# EAGLE board GDEnvSensorNode_1_5 (EAGLE 9.0.1)
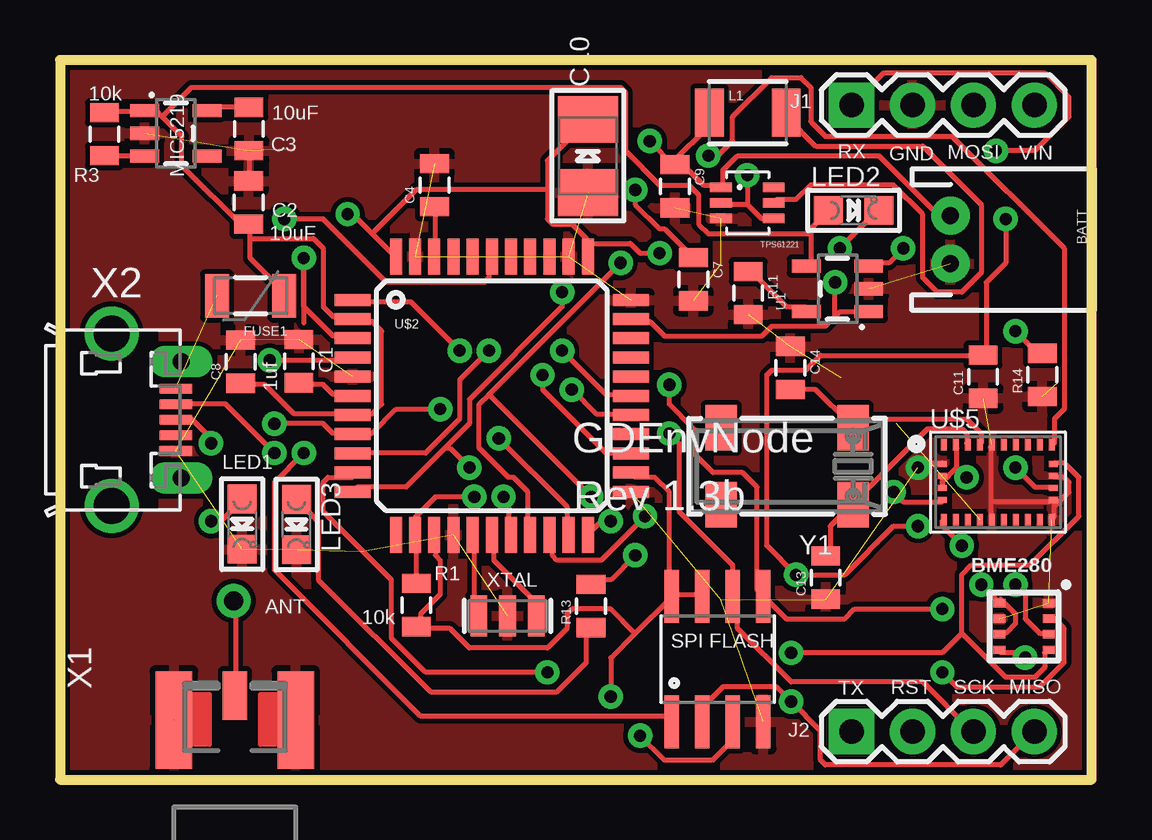
[diagram p0: board, top side]
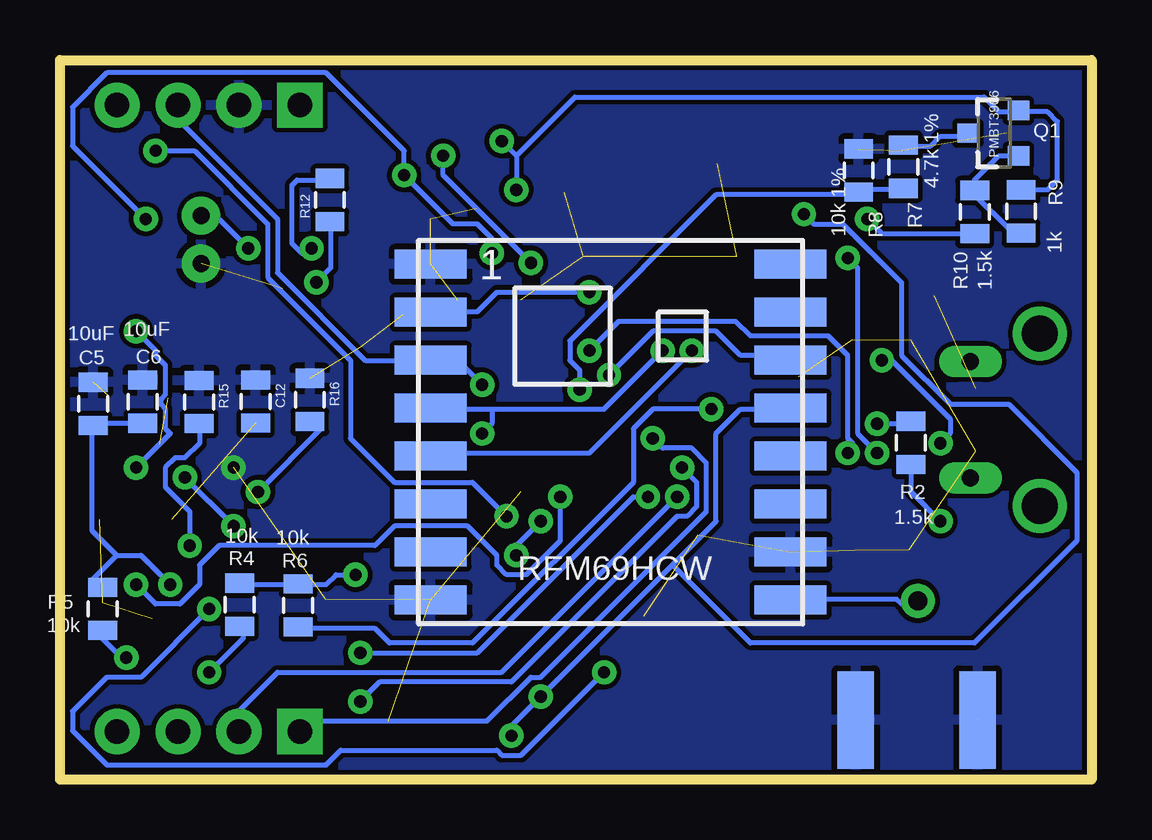
[diagram p1: board, bottom side, seen from below]

Size 43 x 30 mm. Coordinates in mm from the lower left corner, seen from the top.
Outline: 0,0 43,0 43,30 0,30 0,0
Copper layers (1*16): Top 0.035mm / dielectric 1.5mm / Bottom 0.035mm
Design rules "SparkFun": minimum track width 8mil, minimum drill 20mil, track to track 8mil, track to pad 8mil, pad to pad 8mil, via to via 8mil, smd to smd 8mil, copper to edge 8mil, drill to drill 8mil, minimum pad ring 12mil, minimum via ring 10mil, stop-mask expansion 4mil, vias tented up to drill 20mil, thermal gap 10mil

## Footprints (pad centres in the part's own frame; a part is rotated, then mirrored left to right if it is on the bottom)
JST-2-PTH = drill 0.7 pad 1.6: 1 -1,0; 2 1,0
0805 = smd 0.8 x 1.2: 1 -0.9,0; 2 0.9,0
EIA3528-21/B-R = smd 1.95 x 2.5: + 1.525,0; - -1.525,0
PTC-1206 = smd 1 x 1.8: 1 -1.4,0; 2 1.4,0
1X04 = drill 1.016 pad 1.88 square: 1 0,0 | drill 1.016 pad 1.88: 2 2.54,0; 3 5.08,0; 4 7.62,0
1210 = smd 1.2 x 2: 1 -1.6,0; 2 1.6,0
CHIPLED_0805 = smd 1.2 x 1.2: A 0,-1.05; C 0,1.05
SOT23-3 = smd 0.8 x 0.9: 1 -0.95,-1; 2 0.95,-1; 3 0,1.1
SOT23-5 = smd 0.55 x 1.2: 1 -0.95,-1.3; 2 0,-1.3; 3 0.95,-1.3; 4 0.95,1.3; 5 -0.95,1.3
RFM69HCW-XXXS2 = smd 3 x 1.2: 1 -7.5,7; 2 -7.5,5; 3 -7.5,3; 4 -7.5,1; 5 -7.5,-1; 6 -7.5,-3; 7 -7.5,-5; 8 -7.5,-7; 9 7.5,-7; 10 7.5,-5; 11 7.5,-3; 12 7.5,-1; 13 7.5,1; 14 7.5,3; 15 7.5,5; 16 7.5,7
BME280_LGA = smd 0.5 x 0.35: P$1 1.025,0.975; P$2 1.025,0.325; P$3 1.025,-0.325; P$4 1.025,-0.975; P$5 -1.025,-0.975; P$6 -1.025,-0.325; P$7 -1.025,0.325; P$8 -1.025,0.975
SO08 = smd 0.61 x 2.21: 1_CS -1.905,-2.616; 2_SO -0.635,-2.616; 3_WP 0.635,-2.616; 4_GND 1.905,-2.616; 5_SI 1.905,2.616; 6_SCK 0.635,2.616; 7_HOLD -0.635,2.616; 8_VCC -1.905,2.616
TQFP44 = smd 1.5 x 0.5: 1 -5.8,4; 2 -5.8,3.2; 3 -5.8,2.4; 4 -5.8,1.6; 5 -5.8,0.8; 6 -5.8,0; 7 -5.8,-0.8; 8 -5.8,-1.6; 9 -5.8,-2.4; 10 -5.8,-3.2; 11 -5.8,-4; 23 5.8,-4; 24 5.8,-3.2; 25 5.8,-2.4; 26 5.8,-1.6; 27 5.8,-0.8; 28 5.8,0; 29 5.8,0.8; 30 5.8,1.6; 31 5.8,2.4; 32 5.8,3.2; 33 5.8,4 | smd 0.5 x 1.5: 12 -4,-5.8; 13 -3.2,-5.8; 14 -2.4,-5.8; 15 -1.6,-5.8; 16 -0.8,-5.8; 17 0,-5.8; 18 0.8,-5.8; 19 1.6,-5.8; 20 2.4,-5.8; 21 3.2,-5.8; 22 4,-5.8; 34 4,5.8; 35 3.2,5.8; 36 2.4,5.8; 37 1.6,5.8; 38 0.8,5.8; 39 0,5.8; 40 -0.8,5.8; 41 -1.6,5.8; 42 -2.4,5.8; 43 -3.2,5.8; 44 -4,5.8
TPS61221 = smd 0.9 x 0.4: P$1 0,0; P$2 0,-0.65; P$3 0,-1.3; P$4 2.2,-1.3; P$5 2.2,-0.65; P$6 2.2,0
RFM12B-ANTENNA = drill 0.8 pad 1.422: P$1 0,0
MICROBUILDER_BNO055 = smd 0.25 x 0.475: 1 -2.25,1.562; 6 -2.25,-1.562; 7 -1.75,-1.562; 8 -1.25,-1.562; 9 -0.75,-1.562; 10 -0.25,-1.562; 11 0.25,-1.562; 12 0.75,-1.562; 13 1.25,-1.562; 14 1.75,-1.562; 15 2.25,-1.562; 20 2.25,1.562; 21 1.75,1.562; 22 1.25,1.562; 23 0.75,1.562; 24 0.25,1.562; 25 -0.25,1.562; 26 -0.75,1.562; 27 -1.25,1.562; 28 -1.75,1.562 | smd 0.375 x 0.25: 2 -2.312,0.75; 3 -2.312,0.25; 4 -2.312,-0.25; 5 -2.312,-0.75; 16 2.312,-0.75; 17 2.312,-0.25; 18 2.312,0.25; 19 2.312,0.75
SMA_EDGELAUNCH_UFL = smd 4.064 x 1.524: GND@1 2.032,-2.54; GND@2 2.032,2.54 | smd 4.064 x 1.524 bottom: GND@3 2.032,2.54; GND@4 2.032,-2.54 | smd 2.032 x 1.016: P 3.048,0
ZX62D-B-5PA8 = smd 1.35 x 0.4: 1 4.825,1.3; 2 4.825,0.65; 3 4.825,0; 4 4.825,-0.65; 5 4.825,-1.3 | drill 1.5: S1 2.15,-3.6; S2 2.15,3.6 | drill 0.7 long: S3 5.05,2.425; S4 5.05,-2.425
RESONATOR-SMD = smd 0.7 x 1.7: 1 -1.2,0; 2 0,0; 3 1.2,0
CRYSTAL_8X3.8 = smd 1.3 x 1.9: P$1 -2.75,-1.6; P$2 2.75,-1.6; P$3 2.75,1.6; P$4 -2.75,1.6

## Placement (x,y rotation side)
BATT  [JST-2-PTH]  37.12,22.51 270 top
C1  1uf  [0805]  9.96,17.45 90 top
C2  10uF  [0805]  7.87,24.05 90 top
C3  10uF  [0805]  7.88,27.12 270 top
C4  .1uf  [0805]  15.61,24.78 90 top
C5  10uF  [0805]  41.62,15.66 90 bottom
C6  10uF  [0805]  39.55,15.75 90 bottom
C7  10uF  [0805]  26.4,20.86 270 top
C8  10uF  [0805]  7.53,17.42 90 top
C9  10uF  [0805]  25.64,24.73 270 top
C10  220uF  [EIA3528-21/B-R]  22,26 90 top
C11  .1uF  [0805]  38.48,16.8 90 top
C12  .1uF  [0805]  34.84,15.76 270 bottom
C13  22pF  [0805]  31.92,8.42 90 top
C14  22pF  [0805]  30.45,17.16 270 top
FRAME1  FRAME-LETTER  [CREATIVE_COMMONS]  35.59,-9.89 0 top  (outside the outline)
FUSE1  500ma  [PTC-1206]  7.95,20.17 180 top
J1  [1X04]  33,28.12 0 top
J2  [1X04]  33,2 0 top
L1  4.7uH  [1210]  28.67,27.81 0 top
LED1  [CHIPLED_0805]  7.6,10.65 180 top
LED2  Yellow  [CHIPLED_0805]  33.08,23.73 270 top
LED3  [CHIPLED_0805]  9.86,10.63 180 top
Q1  PMBT3906  [SOT23-3]  4.05,26.95 90 bottom
R1  10k  [0805]  14.85,7.27 90 top
R2  1.5k  [0805]  7.53,14.04 90 bottom
R3  10k  [0805]  1.85,26.91 90 top
R4  10k  [0805]  35.52,7.29 90 bottom
R5  10k  [0805]  41.23,7.12 90 bottom
R6  10k  [0805]  33.07,7.26 90 bottom
R7  4.7k 1%  [0805]  7.84,25.55 90 bottom
R8  10k 1%  [0805]  9.71,25.39 270 bottom
R9  1k  [0805]  2.94,23.68 270 bottom
R10  1.5k  [0805]  4.87,23.66 270 bottom
R11  10k  [0805]  28.69,20.28 270 top
R12  1K  [0805]  31.75,24.16 90 bottom
R13  1.5k  [0805]  22.13,7.23 90 top
R14  10k  [0805]  40.95,16.87 90 top
R15  10k  [0805]  37.2,15.74 270 bottom
R16  10k  [0805]  32.58,15.83 270 bottom
U1  MCP73831  [SOT23-5]  32.41,20.46 90 top
U2  RFM69HCW  [RFM69HCW-XXXS2]  20.05,14.48 0 bottom
U3  BME280  [BME280_LGA]  40.19,6.38 0 top
U4  MIC5219  [SOT23-5]  4.83,26.94 270 top
U$1  SPI FLASH  [SO08]  27.41,5.01 0 top
U$2  ATMEGA32U4TQFP-44  [TQFP44]  18,16 0 top
U$3  TPS61221  [TPS61221]  27.55,24.69 0 top
U$4  RFM12B_ANTENNA  [RFM12B-ANTENNA]  7.24,7.45 0 top
U$5  [MICROBUILDER_BNO055]  39.1,12.4 0 top
X1  [SMA_EDGELAUNCH_UFL]  7.29,0.45 90 top
X2  ZX62D-B-5PA8  [ZX62D-B-5PA8]  0,15 0 top
XTAL  RESONATORSMD  [RESONATOR-SMD]  18.65,6.83 180 top
Y1  32.768khz  [CRYSTAL_8X3.8]  30.31,13.06 180 top

## Library data of the parts
BATT = SparkFun-Connectors-ME_Desktop; PROD_ID: CONN-09863; SKU: PRT-09914
C1-C9 C11-C14 = SparkFun-Capacitors
C10 LED1-LED3 Y1 = microbuilder
FRAME1 = SparkFun-Aesthetics
FUSE1 = SparkFun-PowerIC; PROD_ID: RES-11150
J1 J2 = SparkFun-Connectors; PROD_ID: CONN-09696
L1 R1-R16 = SparkFun-Passives
Q1 = SparkFun-DiscreteSemi; PROD_ID: TRANS-08052
U1 = SparkFun-PowerIC; PROD_ID: IC-09995
U2 = SparkFun-RF; PROD_ID: IC-11997, IC-12053
U3 = BME280ComponentLibrary; PROD_ID: IC-13090
U4 = SparkFun-PowerIC; PROD_ID: VREG-09872
U$1 = LowPowerLab
U$2 = SparkFun-DigitalIC
U$3 = GDTech; AVAILABILITY: Unavailable; DESCRIPTION: the tps6122x family devices provide a power-supply solution for products powered by either a single-cell two-cell or ...; MF: Texas Instruments; MP: TPS61221; PACKAGE: SC-70 Texas Instruments; PRICE: None
U$4 = LowPowerLab; LABEL: ANT
U$5 = Adafruit BNO055
X1 = adafruit
X2 = GDTech; MF: Hirose; MPN: ZX62D-B-5PA8; OC_FARNELL: 2300438; OC_NEWARK: 69W0712
XTAL = GDTech

## Nets
3.3V: C10.+ C11.2 R1.1 R4.2 R6.2 U2.13 U$1.3_WP U$1.7_HOLD U$1.8_VCC U$2.14 U$2.24 U$2.34 U$2.44 U$3.P$2 U$3.P$4 U$5.3 U$5.4 U$5.28
A3: R10.2 U$2.39
A7: R7.1 R8.2 U$2.27
ANT: U2.9 U$4.P$1 X1.P
CHG_STAT: R12.1 U1.1 U$2.32
D3: U$3.P$6
D4: U2.14 U$2.25
D7: U2.5 U$2.1
D8: U$1.1_CS U$2.28
D+: U$2.4 X2.3
D-: U$2.3 X2.2
GND: BATT.2 C1.2 C2.2 C3.2 C4.2 C5.2 C6.2 C7.2 C8.2 C9.2 C10.- C11.1 C12.1 C13.1 C14.1 J1.2 LED1.C LED3.C R8.1 R11.2 R14.1 R15.1 R16.1 U1.2 U2.1 U2.8 U2.10 U3.P$1 U3.P$7 U4.2 U$1.4_GND U$2.5 U$2.15 U$2.23 U$2.33 U$2.35 U$2.43 U$3.P$3 U$5.2 U$5.10 U$5.15 U$5.16 U$5.18 U$5.25 X1.GND@1 X1.GND@2 X1.GND@3 X1.GND@4 X2.5 XTAL.2
L: L1.2 U$3.P$5
MISO: J2.4 U2.2 U$1.2_SO U$2.11
MOSI: J1.3 U2.3 U$1.5_SI U$2.10
N$1: U$2.16 XTAL.3
N$2: U$2.17 XTAL.1
N$3: LED1.A R2.1
N$4: LED2.C R12.2
N$5: R4.1 U3.P$2
N$6: C3.1 U4.5
N$7: C4.1 U$2.42
N$8: LED3.A R13.1
N$9: C12.2 U$5.9
N$10: R3.1 U4.3
N$11: Q1.1 R9.2 R10.1
N$12: Q1.3 R7.2
N$13: R13.2 U$2.22
N$15: C5.1 C6.1 R5.2 U3.P$6 U3.P$8
N$16: R11.1 U1.5
N$17: R5.1 U3.P$5
N$19: C13.2 U$5.27 Y1.P$4
N$20: C1.1 U$2.6
N$21: C14.2 U$5.26 Y1.P$1
N$25: U$5.14
N$26: U$5.11
N$27: R14.2 U$5.17
N$28: R15.2 U$5.6
N$29: R16.2 U$5.5
RST: J2.2 R1.2 U$2.13
RX: J1.1 U$2.20
SCK: J2.3 U2.4 U$1.6_SCK U$2.9
SCL: U3.P$4 U$2.18 U$5.19
SDA: U3.P$3 U$2.19 U$5.20
SS: R2.2 R6.1 U$2.8
TX: J2.1 U$2.21
VBAT: BATT.1 C7.1 C9.1 L1.1 Q1.2 R9.1 U1.3 U$3.P$1
VBUS: C2.1 C8.1 FUSE1.1 LED2.A R3.2 U1.4 U4.1 U$2.2 U$2.7
VBUS_RAW: FUSE1.2 X2.1
VIN: J1.4

## Tracks (layer width: path | path; a pad name or v marks a point on that pad's centre or on a via)
3.3V  (via drill 0.51)
  Top 0.203: U$2.14 15.65,10.16 15.65,9.35 15.85,9.14 15.85,7.72 15.04,6.91 15.04,6.5 R1.1 15.04,6.3 16.26,6.3 17.07,5.49 20.32,5.49 21.13,6.3 21.13,6.91 21.34,7.11 22.96,7.11 23.98,6.1 | U$2.24 23.98,12.6 24.79,12.6 25.4,11.99 25.4,7.72 U$1.8_VCC | v24.18,1.83 25.2,0.81 27.23,0.81 28.04,1.63 28.04,2.23 U$1.3_WP | v22.96,3.45 22.96,5.08 23.98,6.1 | 23.98,6.1 25.4,7.52 U$1.8_VCC | U$1.7_HOLD 26.62,7.72 25.6,7.72 U$1.8_VCC | 36.78,12.39 36.78,12.6 U$5.3 | 36.78,12.39 36.78,12.19 U$5.4 | 37.39,13.01 37.39,13.82 U$5.28 | 36.78,12.39 37.39,13.01 | v37.8,12.6 37.39,13.01 | v35.76,10.57 34.75,10.57 32.72,8.53 v30.68,8.53 29.46,9.75 29.46,16.87 29.67,17.07 31.09,17.07 31.7,17.68 38.41,17.68 C11.2 38.61,17.88 38.61,20.73 39.42,21.54 v39.42,23.37 | 13.01,22.76 11.99,23.77 v11.99,23.57 | 13.01,22.76 13.82,21.95 U$2.44 | 28.65,23.98 27.64,23.98 U$3.P$2 | 28.65,23.98 29.26,23.37 29.67,23.37 U$3.P$4 | 21.95,22.35 21.95,22.55 21.34,23.16 20.52,23.16 20.32,23.37 20.32,24.59 | 21.95,22.35 21.95,21.95 U$2.34 21.95,22.35 | 20.32,24.59 20.32,25.81 21.95,27.43 C10.+ | v28.65,25.2 28.65,23.98 | v24.99,21.95 24.18,21.95 23.77,22.35 21.95,22.35 | 13.01,22.76 14.83,24.59 20.32,24.59
  Bottom 0.203: v24.18,1.83 24.18,2.23 v22.96,3.45 17.48,8.94 | 17.48,8.94 15.65,10.77 15.65,14.43 14.63,15.44 12.6,15.44 U2.13 | R4.2 35.36,8.13 33.12,8.13 R6.2 32.92,8.13 31.9,8.13 31.5,8.53 v30.68,8.53 | v35.76,10.57 v37.8,12.6 | v24.99,21.95 24.99,22.55 25.6,23.16 26.62,23.16 v28.65,25.2 28.65,26.21 31.9,29.46 41.05,29.46 42.47,28.04 42.47,26.42 v39.42,23.37 | 17.48,8.94 14.22,5.69 4.88,5.69 0.61,9.96 0.61,12.8 3.45,15.65 5.89,15.65 7.92,17.68 7.92,20.73 10.36,23.16 11.58,23.16 v11.99,23.57
A3  (via drill 0.51)
  Top 0.203: v9.35,23.37 10.97,23.37 13.61,20.73 17.68,20.73 17.88,20.93 17.88,21.74 U$2.39
  Bottom 0.203: v9.35,23.37 8.74,22.76 R10.2
A7  (via drill 0.51)
  Top 0.203: v21.34,16.26 22.35,15.24 23.77,15.24 U$2.27
  Bottom 0.203: R7.1 7.92,24.59 9.55,24.59 R8.2 9.75,24.38 15.65,24.38 21.74,18.29 21.74,17.48 21.34,17.07 v21.34,16.26
ANT
  Top 0.203: X1.P 7.32,3.66 7.32,7.32 U$4.P$1
  Bottom 0.203: U2.9 12.39,7.52 8.13,7.52 7.92,7.32 7.32,7.32 U$4.P$1
CHG_STAT  (via drill 0.51)
  Top 0.203: 32.31,19.3 31.9,18.9 29.67,18.9 29.26,18.49 25.2,18.49 24.59,19.1 23.98,19.1 U$2.32 | 32.31,19.3 32.51,19.51 33.53,19.51 U1.1 | 32.31,19.3 v32.31,20.73
  Bottom 0.203: v32.31,20.73 31.7,21.34 31.7,23.16 R12.1
D4  (via drill 0.51)
  Top 0.203: v20.12,16.87 20.12,16.26 22.76,13.61 23.77,13.61 U$2.25
  Bottom 0.203: v20.12,16.87 18.29,18.69 15.65,18.69 14.63,17.68 12.6,17.68 U2.14
D7  (via drill 0.51)
  Top 0.203: v16.66,17.88 14.63,19.91 12.39,19.91 U$2.1
  Bottom 0.203: v16.66,17.88 20.93,13.61 27.43,13.61 U2.5
D8  (via drill 0.51)
  Top 0.203: v20.93,17.88 22.76,16.05 23.77,16.05 U$2.28 | v10.16,13.61 8.94,12.39 8.94,8.74 15.04,2.64 25.2,2.64 25.4,2.44 U$1.1_CS
  Bottom 0.203: v20.93,17.88 19.71,19.1 14.83,19.1 14.22,18.49 10.97,18.49 10.16,17.68 10.16,14.22 9.96,14.02 9.96,13.82 v10.16,13.61
D+  (via drill 0.51)
  Top 0.203: v6.3,14.02 6.3,14.22 5.49,15.04 4.88,15.04 X2.3 | v8.74,17.48 12.19,17.48 U$2.4
  Bottom 0.203: v6.3,14.02 5.89,14.43 5.89,15.04 8.33,17.48 v8.74,17.48
D-  (via drill 0.51)
  Top 0.203: v8.94,13.61 6.91,15.65 4.88,15.65 X2.2 | U$2.3 12.19,18.49 11.38,18.49 10.16,19.71 v10.16,21.74 10.16,19.05
  Bottom 0.203: v8.94,13.61 9.75,14.43 9.75,21.34 v10.16,21.74
GND  (via drill 0.51)  (29 unrouted)
  Top 0.203: 38.81,11.58 38.81,13.82 U$5.25 | 38.81,11.58 38.81,10.97 U$5.10 | 41.45,11.38 41.45,10.97 U$5.15 | 41.45,11.38 41.45,11.58 U$5.16 41.25,11.58 38.81,11.58 | 41.45,11.38 42.06,11.99 42.06,12.39 41.86,12.6 41.45,12.6 U$5.18 | v35.76,13.01 35.97,13.21 36.78,13.21 U$5.2 | C3.2 C2.2
  pour Top: 0,30 43,30 43,0 0,0
  pour Bottom: 0,30 43,30 43,0 0,0
L
  Top 0.203: U$3.P$5 29.87,24.18 30.68,24.18 31.29,24.79 34.75,24.79 35.97,23.57 35.97,20.93 36.58,20.32 37.59,20.32 38.41,21.13 38.41,23.98 35.97,26.42 31.5,26.42 30.28,27.64 L1.2
MISO  (via drill 0.51)
  Top 0.203: U$1.2_SO 26.82,2.44 26.82,3.05 27.64,3.86 29.87,3.86 v30.48,3.25 31.7,2.03 31.7,0.81 31.9,0.61 39.22,0.61 40.44,1.83 J2.4 | 16.05,13.82 17.07,14.83 17.07,15.85 20.93,19.71 v20.93,20.32 | 16.05,13.82 14.43,12.19 12.39,12.19 U$2.11 | v17.07,13.01 16.26,13.82 16.05,13.82
  Bottom 0.203: v20.93,20.32 24.79,20.32 25.6,19.51 27.43,19.51 U2.2 | v30.48,3.25 29.67,4.06 24.18,4.06 17.27,10.97 16.87,10.97 16.46,11.38 16.46,12.39 v17.07,13.01
MOSI  (via drill 0.51)
  Top 0.203: v20.32,4.47 15.24,4.47 13.82,5.89 13.82,8.33 10.97,11.18 10.97,12.39 11.18,12.6 12.19,12.6 U$2.10 | v36.78,7.11 33.12,7.11 32.72,6.71 30.28,6.71 29.46,7.52 U$1.5_SI 29.26,7.72 29.06,7.92 29.06,12.19 28.45,12.8 27.23,12.8 26.42,13.61 26.42,14.63 25.4,15.65 v25.4,16.46
  Bottom 0.203: J1.3 38,28.04 38,27.43 33.93,23.37 33.93,21.13 30.28,17.48 27.64,17.48 U2.3 27.43,17.48 26.42,17.48 v25.4,16.46 | v20.32,4.47 23.77,1.02 24.59,1.02 24.79,1.22 31.29,1.22 31.9,0.61 41.05,0.61 42.47,2.03 42.47,2.85 41.05,4.27 39.62,4.27 v36.78,7.11
N$1
  Top 0.203: U$2.16 17.27,10.16 17.27,6.91 XTAL.3
N$2
  Top 0.203: U$2.17 18.09,10.16 18.09,9.14 19.71,7.52 19.71,6.91 XTAL.1
N$3  (via drill 0.51)
  Top 0.203: v6.3,10.77 6.71,10.77 7.52,11.58 LED1.A
  Bottom 0.203: v6.3,10.77 7.52,11.99 7.52,13.01 R2.1
N$4  (via drill 0.51)
  Top 0.203: v32.51,22.15 33.93,23.57 LED2.C
  Bottom 0.203: v32.51,22.15 32.72,21.95 32.92,21.95 33.33,22.35 33.33,24.79 33.12,24.99 31.9,24.99 R12.2
N$5  (via drill 0.51)
  Top 0.203: v36.78,4.47 37.39,3.86 40.84,3.86 41.86,4.88 41.86,6.3 41.45,6.71 41.25,6.71 U3.P$2
  Bottom 0.203: v36.78,4.47 35.36,5.89 35.36,6.3 R4.1
N$6
  Top 0.203: 7.92,27.84 C3.1 7.72,28.04 6.3,28.04 U4.5
N$7
  Top 0.203: C4.1 15.65,23.77 15.65,21.95 U$2.42
N$8
  Top 0.203: R13.1 21.95,6.3 21.95,4.88 20.73,3.66 15.44,3.66 10.77,8.33 10.77,10.77 9.96,11.58 LED3.A
N$9  (1 unrouted)
N$10
  Top 0.203: U4.3 3.45,26.01 2.03,26.01 R3.1
N$11
  Bottom 0.203: Q1.1 3.25,26.01 3.86,26.01 4.88,24.99 4.88,24.59 R10.1 4.88,24.38 3.45,22.96 3.05,22.96 R9.2
N$12
  Bottom 0.203: Q1.3 5.28,26.82 6.3,26.82 6.71,26.42 7.72,26.42 R7.2
N$13  (via drill 0.51)
  Top 0.203: v23.98,9.35 22.96,8.33 22.15,8.33 R13.2 | v22.96,10.77 22.55,10.77 22.15,10.36 U$2.22
  Bottom 0.203: v23.98,9.35 23.98,9.75 v22.96,10.77
N$15  (via drill 0.51)
  Top 0.203: U3.P$6 39.22,6.1 39.42,6.1 39.83,6.5 39.83,6.91 39.22,7.52 U3.P$8 39.01,7.52 v38.41,8.13
  Bottom 0.203: C6.1 39.62,14.83 41.45,14.83 C5.1 41.66,14.63 41.66,10.36 40.64,9.35 | v38.41,8.13 39.62,9.35 40.64,9.35 | 40.64,9.35 41.66,8.33 41.25,7.92 R5.2
N$16
  Top 0.203: U1.5 31.09,19.71 30.28,19.71 28.85,21.13 R11.1
N$17  (via drill 0.51)
  Top 0.203: v40.23,5.08 40.03,5.28 39.22,5.28 U3.P$5
  Bottom 0.203: v40.23,5.08 40.44,5.08 41.45,6.1 41.25,6.3 R5.1
N$19
  Top 0.203: U$5.27 37.8,14.02 37.8,14.43 37.59,14.63 36.17,14.63 33.12,11.58 Y1.P$4 32.92,11.38 32.11,10.57 32.11,9.35 C13.2
N$20
  Top 0.203: C1.1 10.16,16.46 10.97,16.46 11.38,16.05 12.19,16.05 U$2.6
N$21
  Top 0.203: U$5.26 38.41,14.02 38.41,14.43 37.8,15.04 33.33,15.04 33.12,14.83 Y1.P$1 32.92,14.83 31.5,16.26 30.48,16.26 C14.2
N$27  (via drill 0.51)
  Top 0.203: v39.83,13.01 40.64,12.19 41.25,12.19 U$5.17 | v39.83,18.69 40.84,17.68 R14.2
  Bottom 0.203: v39.83,13.01 38.41,14.43 38.61,14.63 38.61,15.44 38.81,15.65 38.81,15.85 38.61,16.05 38.61,17.27 39.01,17.68 39.01,17.88 v39.83,18.69
N$28  (via drill 0.51)
  Top 0.203: v37.59,9.75 36.78,10.57 36.78,10.77 U$5.6
  Bottom 0.203: v37.59,9.75 37.59,11.18 38.61,12.19 38.61,13.01 38.2,13.41 37.8,13.41 37.19,14.02 37.19,14.83 R15.2
N$29  (via drill 0.51)
  Top 0.203: v34.75,11.99 35.15,11.58 36.78,11.58 U$5.5
  Bottom 0.203: v34.75,11.99 32.11,14.63 32.51,15.04 R16.2
RST  (via drill 0.51)
  Top 0.203: R1.2 14.83,8.33 14.83,10.16 U$2.13 14.83,10.36 14.83,10.97 15.65,11.79 v17.27,11.79
  Bottom 0.203: v17.27,11.79 24.59,4.47 33.93,4.47 35.56,2.85 35.56,2.03 J2.2
RX  (via drill 0.51)
  Top 0.203: v24.38,10.97 22.55,9.14 20.73,9.14 20.52,9.35 20.52,10.16 U$2.20 | v39.01,26.21 40.64,26.21 42.06,27.64 42.06,28.45 41.05,29.46 34.34,29.46 33.12,28.25 J1.1
  Bottom 0.203: v24.38,10.97 25.81,12.39 29.06,12.39 30.89,14.22 30.89,17.48 34.34,20.93 34.34,23.16 37.39,26.21 v39.01,26.21
SCK  (via drill 0.51)
  Top 0.203: J2.3 38,2.03 35.97,4.06 30.48,4.06 28.25,6.3 28.25,7.52 U$1.6_SCK 28.04,7.72 28.04,8.94 25.81,11.18 25.81,14.02 v25.4,14.43 | v17.88,17.88 16.66,16.66 16.66,15.04 15.24,13.61 12.39,13.61 U$2.9
  Bottom 0.203: v17.88,17.88 20.32,15.44 24.99,15.44 | 24.99,15.44 27.43,15.44 U2.4 | v25.4,14.43 24.99,14.83 24.99,15.44
SCL  (via drill 0.51)
  Top 0.203: 37.59,6.1 37.59,8.53 38,8.94 40.44,8.94 42.47,10.97 42.47,12.6 41.86,13.21 41.45,13.21 U$5.19 | 37.59,6.1 39.42,4.27 40.64,4.27 41.05,4.67 41.05,5.28 U3.P$4 | v18.49,11.79 18.69,11.58 18.69,10.36 U$2.18 | v30.48,5.28 36.78,5.28 37.59,6.1
  Bottom 0.203: v18.49,11.79 19.1,11.79 25.6,5.28 v30.48,5.28
SDA  (via drill 0.51)
  Top 0.203: v27.03,26.01 27.43,26.01 28.04,26.62 28.04,27.64 29.67,29.26 30.89,29.26 31.29,28.85 31.29,27.43 31.9,26.82 37.19,26.82 41.86,22.15 41.86,15.44 41.45,15.04 41.45,14.02 U$5.20 | 17.88,16.05 17.48,15.65 17.48,13.82 18.69,12.6 18.9,12.6 19.51,11.99 19.51,10.36 U$2.19 | 17.88,16.05 v23.37,21.54 | v39.83,8.13 40.23,7.72 40.23,6.71 40.84,6.1 41.05,6.1 U3.P$3 | 17.88,16.05 v22.15,11.79
  Bottom 0.203: v27.03,26.01 27.03,25.2 v23.37,21.54 | v39.83,8.13 39.01,7.32 38,7.32 37.19,8.13 37.19,8.94 36.37,9.75 29.87,9.75 29.06,10.57 26.01,10.57 24.79,9.35 24.79,8.94 24.38,8.53 23.57,8.53 22.15,9.96 v22.15,11.79
SS  (via drill 0.51)
  Top 0.203: v15.85,15.44 14.02,15.44 13.01,14.43 12.39,14.43 U$2.8 12.19,14.43 11.38,14.43 10.97,14.83 v8.94,14.83
  Bottom 0.203: v15.85,15.44 18.29,15.44 19.1,14.63 19.1,12.39 25.81,5.69 29.26,5.69 29.87,6.3 32.92,6.3 R6.1 | v8.94,14.83 7.72,14.83 R2.2
TX  (via drill 0.51)
  Top 0.203: v18.29,14.22 21.13,11.38 21.13,10.36 U$2.21
  Bottom 0.203: v18.29,14.22 17.88,13.82 16.66,13.82 16.05,13.21 16.05,11.18 22.96,4.27 23.37,4.27 25.2,2.44 32.51,2.44 32.92,2.03 J2.1
VBAT  (via drill 0.51)
  Top 0.203: v35.15,22.15 34.54,21.54 33.73,21.54 U1.3 | C9.1 25.81,25.81 26.82,24.79 27.43,24.79 U$3.P$1 27.64,24.79 27.64,25.4 28.25,26.01 34.14,26.01 36.58,23.57 36.98,23.57 BATT.1 | v23.98,24.59 23.98,23.98 24.99,22.96 25.2,22.96 26.21,21.95 C7.1 | v24.59,26.62 25.6,25.6 C9.1 | L1.1 27.03,27.64 27.03,27.23 25.6,25.81 C9.1
  Bottom 0.203: v35.15,22.15 36.37,23.37 36.98,23.37 BATT.1 | R9.1 2.85,24.59 1.83,24.59 1.42,24.99 1.42,27.43 1.83,27.84 3.05,27.84 Q1.2 3.25,27.84 3.86,27.84 4.47,28.45 21.54,28.45 23.98,26.01 | 23.98,26.01 v23.98,24.59 | v24.59,26.62 23.98,26.01
VBUS
  Top 0.203: C8.1 7.72,16.46 8.53,16.46 9.75,15.24 12.19,15.24 U$2.7 12.39,15.24 13.01,15.24 13.41,15.65 13.41,18.69 13.01,19.1 12.39,19.1 U$2.2 12.19,19.3 11.38,19.3 10.97,19.71 10.97,22.15 10.57,22.55 7.92,22.55 | 31.29,22.76 31.29,22.96 31.9,23.57 LED2.A | 31.29,22.76 31.29,21.54 U1.4 | R3.2 2.03,27.84 3.45,27.84 U4.1 3.66,27.84 4.06,27.84 4.27,27.64 | 7.92,22.55 7.92,21.74 9.35,20.32 FUSE1.1 | 7.92,22.55 7.92,22.96 C2.1 7.72,22.96 5.08,25.6 5.08,26.82 4.27,27.64 | 31.29,22.76 27.03,22.76 26.62,23.16 26.62,24.38 26.21,24.79 24.99,24.79 23.57,26.21 23.57,28.65 23.37,28.85 5.49,28.85 4.27,27.64
VBUS_RAW  (1 unrouted)

## Text on the board
tPlace: RX | GND | MOSI | VIN | GDEnvNode | Rev 1.3b | TX | RST | SCK | MISO